# EAGLE board riser-extender (EAGLE 7.7.0)
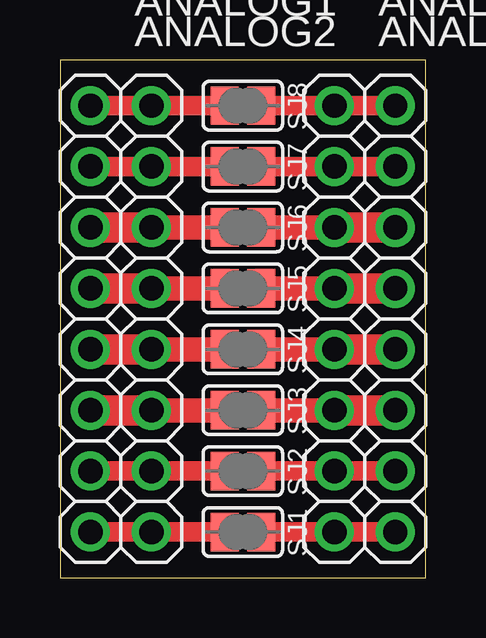
[diagram p0: board, top side]
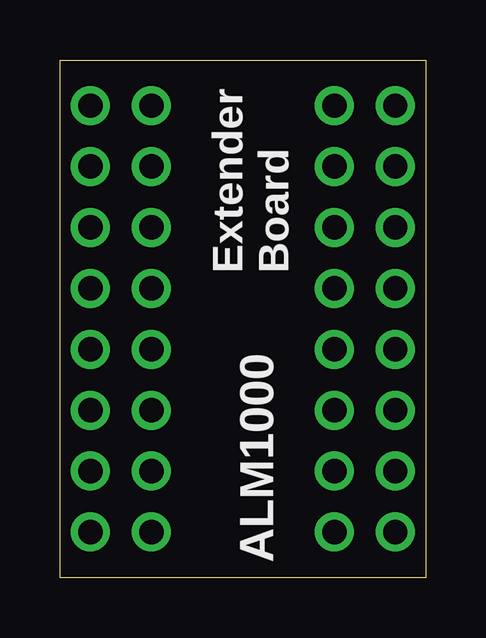
[diagram p1: board, bottom side, seen from below]

Size 15.24 x 21.59 mm. Coordinates in mm from the lower left corner, seen from the top.
Outline: 15.24,0 15.24,21.59 0,21.59 0,0 15.24,0
Copper layers (1*16): Top 0.035mm / dielectric 1.5mm / Bottom 0.035mm
Design rules "default": minimum track width 8mil, minimum drill 20mil, track to track 8mil, track to pad 8mil, pad to pad 8mil, via to via 8mil, smd to smd 8mil, copper to edge 8mil, drill to drill 8mil, minimum pad ring 12mil, minimum via ring 10mil, stop-mask expansion 4mil, vias tented up to drill 20mil, thermal gap 10mil

## Footprints (pad centres in the part's own frame; a part is rotated, then mirrored left to right if it is on the bottom)
1X08 = drill 1.016: 1 -8.89,0; 2 -6.35,0; 3 -3.81,0; 4 -1.27,0; 5 1.27,0; 6 3.81,0; 7 6.35,0; 8 8.89,0
SJ = smd 1.168 x 1.6: 1 -0.762,0; 2 0.762,0

## Placement (x,y rotation side)
ANALOG1  [1X08]  1.27,10.79 270 top
ANALOG2  [1X08]  3.81,10.79 270 top
ANALOG3  [1X08]  11.43,10.79 270 top
ANALOG4  [1X08]  13.97,10.79 270 top
SJ1  [SJ]  7.62,1.91 180 top
SJ2  [SJ]  7.62,4.45 180 top
SJ3  [SJ]  7.62,6.99 180 top
SJ4  [SJ]  7.62,9.53 180 top
SJ5  [SJ]  7.62,12.06 180 top
SJ6  [SJ]  7.62,14.61 180 top
SJ7  [SJ]  7.62,17.14 180 top
SJ8  [SJ]  7.62,19.68 180 top

## Library data of the parts
ANALOG1-ANALOG4 = pinhead
SJ1-SJ8 = jumper

## Nets
N$1: ANALOG1.1 ANALOG2.1 SJ8.2
N$2: ANALOG1.2 ANALOG2.2 SJ7.2
N$3: ANALOG1.3 ANALOG2.3 SJ6.2
N$4: ANALOG1.4 ANALOG2.4 SJ5.2
N$5: ANALOG1.5 ANALOG2.5 SJ4.2
N$6: ANALOG1.6 ANALOG2.6 SJ3.2
N$7: ANALOG1.7 ANALOG2.7 SJ2.2
N$8: ANALOG1.8 ANALOG2.8 SJ1.2
N$9: ANALOG3.5 ANALOG4.5 SJ4.1
N$10: ANALOG3.6 ANALOG4.6 SJ3.1
N$11: ANALOG3.7 ANALOG4.7 SJ2.1
N$12: ANALOG3.8 ANALOG4.8 SJ1.1
N$13: ANALOG3.4 ANALOG4.4 SJ5.1
N$14: ANALOG3.3 ANALOG4.3 SJ6.1
N$15: ANALOG3.2 ANALOG4.2 SJ7.1
N$16: ANALOG3.1 ANALOG4.1 SJ8.1

## Tracks (layer width: path | path; a pad name or v marks a point on that pad's centre or on a via)
N$1
  Top 0.813: ANALOG1.1 ANALOG2.1 SJ8.2
N$2
  Top 0.813: ANALOG1.2 ANALOG2.2 SJ7.2
N$3
  Top 1.016: ANALOG2.3 SJ6.2
  Top 1.27: ANALOG1.3 ANALOG2.3
N$4
  Top 1.016: ANALOG2.4 SJ5.2
  Top 1.27: ANALOG1.4 ANALOG2.4
N$5
  Top 1.016: ANALOG2.5 SJ4.2
  Top 1.27: ANALOG1.5 ANALOG2.5
N$6
  Top 1.016: ANALOG2.6 SJ3.2
  Top 1.27: ANALOG1.6 ANALOG2.6
N$7
  Top 0.813: ANALOG1.7 ANALOG2.7 SJ2.2
N$8
  Top 0.813: ANALOG1.8 ANALOG2.8 SJ1.2
N$9
  Top 1.016: ANALOG3.5 SJ4.1
  Top 1.27: ANALOG4.5 ANALOG3.5
N$10
  Top 1.016: ANALOG3.6 SJ3.1
  Top 1.27: ANALOG4.6 ANALOG3.6
N$11
  Top 0.813: ANALOG4.7 ANALOG3.7 SJ2.1
N$12
  Top 0.813: ANALOG4.8 ANALOG3.8 SJ1.1
N$13
  Top 1.016: ANALOG3.4 SJ5.1
  Top 1.27: ANALOG4.4 ANALOG3.4
N$14
  Top 1.016: ANALOG3.3 SJ6.1
  Top 1.27: ANALOG4.3 ANALOG3.3
N$15
  Top 0.813: ANALOG4.2 ANALOG3.2 SJ7.1
N$16
  Top 0.813: ANALOG4.1 ANALOG3.1 SJ8.1

## Text on the board
bPlace: Extender / Board | ALM1000